# Altium PCB diplom.PcbDoc (part 2 of 2)
Units mm, origin at the board's own origin, x right, y up, seen from the top; angles counter-clockwise.
Board outline 160 x 160 mm, 2 copper layers (Top Layer, Bottom Layer), stack 1.099 mm thick; 231 components, 171 nets, 635 pads, 180 vias.
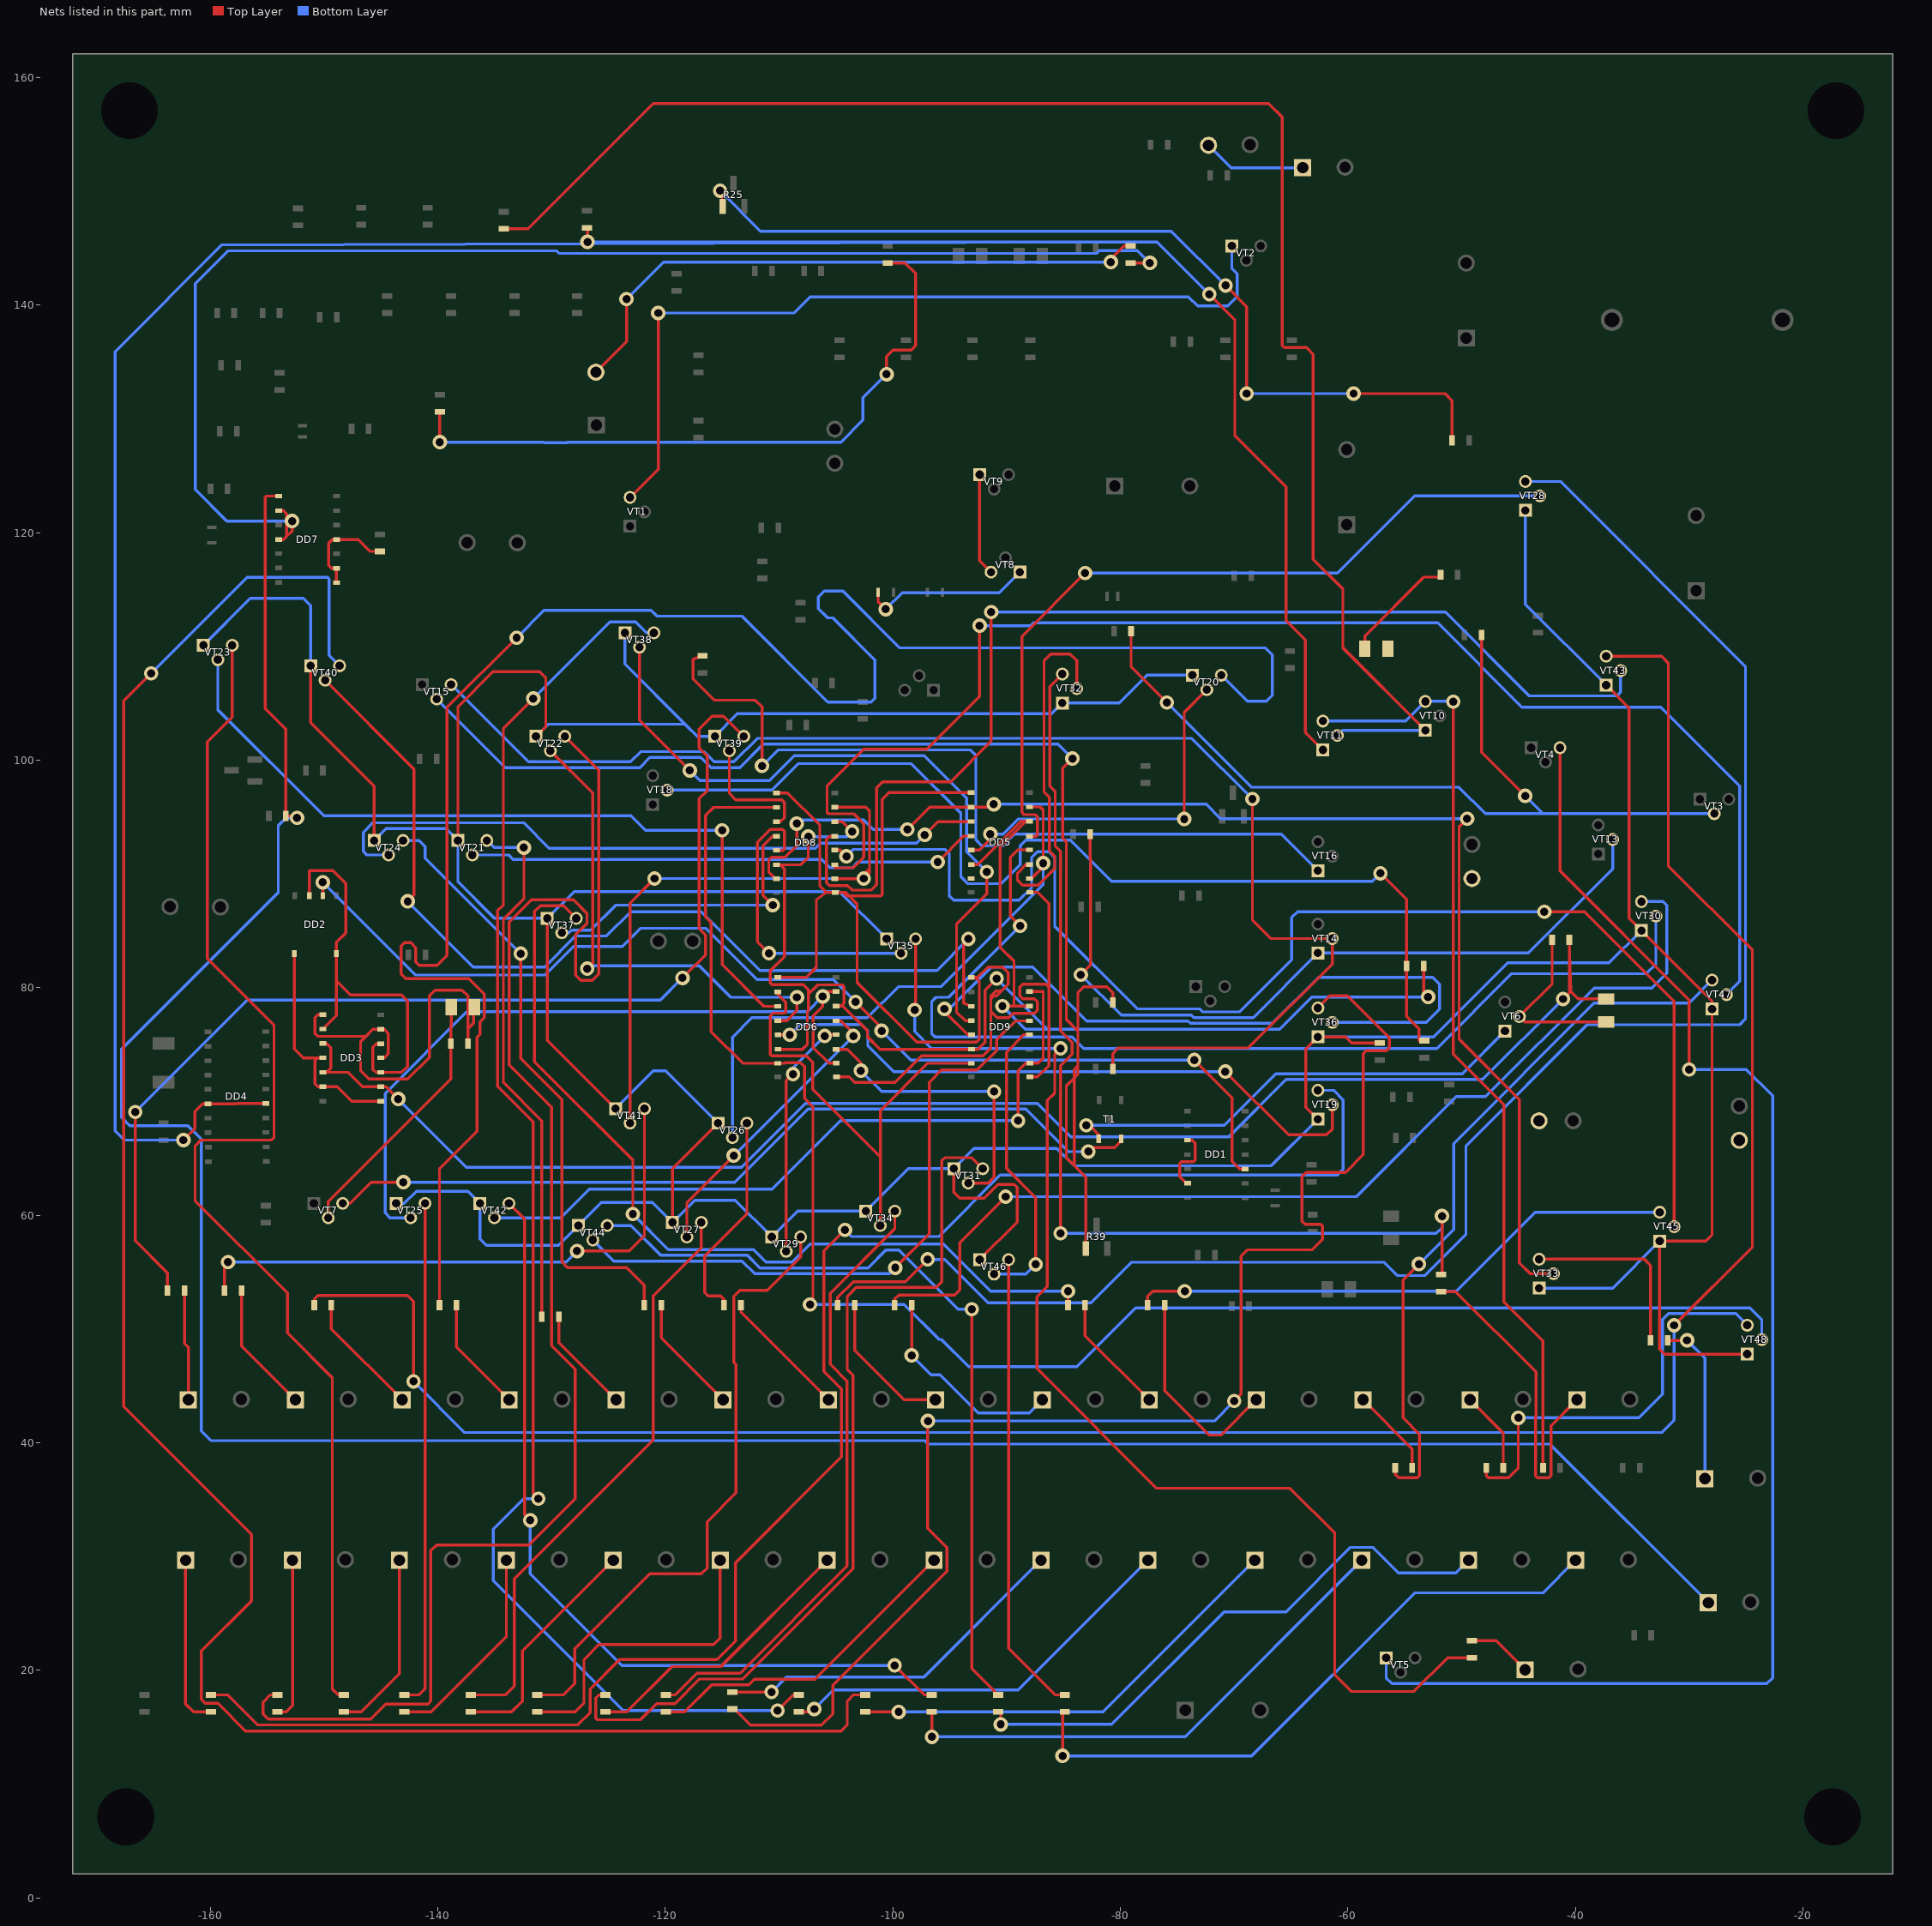
[diagram p2: the nets of this part, all layers, seen from the top]

## Via types
v1: diameter 1.27, hole 0.711, Top Layer to Bottom Layer, 180 vias

## Nets (pads, with @x,y where several pads share a name; then routed paths per layer and width w, separated by ;. In a path a pad name is that pad's centre, name@x,y a point inside that pad or via, vN(x,y) a via of type N, cw(c..) or ccw(c..) an arc to the next point about the centre after c; other vN are vias at no path point) (continued)
NetC39_1: C39.1 VT19.1 VT20.1 VT21.1 VT22.1 VT23.1 VT24.1 VT25.1 VT26.1 VT27.1 VT28.1 VT29.1 VT30.1 VT31.1 VT32.1 VT33.1 VT34.1 VT35.1 VT36.1 VT37.1 VT38.1 VT39.1 VT40.1 VT41.1 VT42.1 VT43.1 VT44.1 VT45.1 VT46.1 VT47.1 VT48.1 | length 489.8
  Top Layer w0.254: VT40.1@-151.17,108.3 -151.17,103.313 -145.589,97.732 VT24.1@-145.589,92.942 ; VT21.1@-138.223,92.942 -138.223,104.709 -135.146,107.787 -131.056,107.787 -130.497,107.228 -130.497,102.973 VT22.1@-131.37,102.1 ; VT37.1@-130.37,86.1 -130.37,75.37 VT41.1@-124.37,69.37 ; VT27.1@-119.37,59.37 -119.37,64.1 VT26.1@-115.37,68.1 ; VT31.1@-94.64,64.1 -94.64,62.016 -94.132,61.508 -91.966,61.508 -90.772,62.702 -89.324,62.702 -89.07,62.448 -89.07,59.4 VT46.1@-92.37,56.1 ; VT19.1@-62.643,68.446 -63.695,69.498 -63.695,74.633 VT36.1@-62.643,75.685 -60.19,75.685 -59.655,75.15 C39.1@-57.2,75.15 ; VT43.1@-37.3,106.6 -35.276,104.576 -35.276,86.106 VT30.1@-34.2,85.03 -28,78.83 VT47.1@-28,78.13 -28,58.272 -28.542,57.73 VT45.1@-32.6,57.73 -32.6,48.226 -32.174,47.8 VT48.1@-24.9,47.8
  Bottom Layer w0.254: VT23.1@-160.6,110.1 -156.47,114.23 -151.808,114.23 -151.17,113.592 VT40.1@-151.17,108.3 ; VT24.1@-145.589,92.942 -144.537,93.995 -139.275,93.995 VT21.1@-138.223,92.942 -138.223,89.3 -135.023,86.1 VT37.1@-130.37,86.1 -128.01,88.46 -104.7,88.46 VT35.1@-100.54,84.3 ; VT25.1@-143.655,61.049 -142.943,61.049 -141.875,62.118 -137.358,62.118 VT42.1@-136.289,61.049 -136.289,57.927 -135.73,57.368 -129.372,57.368 VT44.1@-127.64,59.1 -125.613,61.127 -121.127,61.127 VT27.1@-119.37,59.37 -117.423,61.317 -113.857,61.317 VT29.1@-110.64,58.1 -108.37,60.37 VT34.1@-102.37,60.37 -98.64,64.1 VT31.1@-94.64,64.1 -92.863,65.877 -85.59,65.877 -84.066,64.353 -66.737,64.353 VT19.1@-62.643,68.446 ; VT22.1@-131.37,102.1 -130.306,103.164 -118.255,103.164 ; VT41.1@-124.37,69.37 -121.056,72.684 -119.954,72.684 VT26.1@-115.37,68.1 ; VT38.1@-123.54,111.2 -123.54,108.449 -118.255,103.164 ; VT20.1@-73.67,107.47 -77.64,107.47 -80.08,105.03 VT32.1@-85.1,105.03 -86.052,104.078 -113.662,104.078 VT39.1@-115.64,102.1 -117.191,102.1 -118.255,103.164 ; VT36.1@-62.643,75.685 -52.465,75.685 -45.966,82.184 -37.046,82.184 VT30.1@-34.2,85.03 ; VT28.1@-44.4,121.96 -44.4,113.7 VT43.1@-37.3,106.6 ; VT33.1@-43.2,53.6 -36.73,53.6 VT45.1@-32.6,57.73
NetDD1_3: DD1.3 DD1.6 | length 5.8
  Top Layer w0.254: DD1.3@-74.105,66.605 -73.695,66.605 -73.424,66.334 -73.424,64.861 -73.576,64.708 -74.629,64.708 -74.781,64.556 -74.781,63.4 -74.211,62.83 DD1.6@-74.1,62.83
NetDD1_10: DD1.10 DD2.3 | length 99.5
  Top Layer w0.254: v1(-150.106,89.27) -150.1,89.264 DD2.3@-150.1,88.1 ; v1(-103.269,78.755) -100.983,76.469 v1(-100.983,76.215) ; v1(-73.5,73.649) -70.172,70.322 -70.172,64.735 -69.512,64.075 DD1.10@-69.025,64.075
  Bottom Layer w0.254: v1(-150.106,89.27) -141.953,81.117 -130.583,81.117 -128.069,83.631 -123.766,83.631 -122.166,85.232 -116.451,85.232 -111.955,80.736 -105.25,80.736 v1(-103.269,78.755) ; v1(-100.983,76.215) -98.417,73.649 v1(-73.5,73.649)
NetDD2_1: DD2.1 DD3.1 DD3.11 DD3.13 | length 20
  Top Layer w0.254: DD2.1@-152.6,83 -152.6,74.632 -151.808,73.84 -150.538,73.84 ; DD3.11@-150.1,73.84 -150.538,73.84 ; DD3.1@-145.02,70.03 -147.566,70.03 -148.836,71.3 DD3.13@-150.1,71.3 -150.538,71.3 -150.792,71.554 -150.792,73.586 -150.538,73.84
NetDD2_2: DD2.2 DD2.5 DD3.3 DD3.5 DD3.9 | length 38.4
  Top Layer w0.254: DD2.5@-151.29,88.08 -151.29,90.245 -151.23,90.305 -149.198,90.305 -148.074,89.181 -148.074,84.813 -148.9,83.987 DD2.2@-148.9,83 -148.9,81.815 -148.9,80.596 ; DD3.9@-150.1,76.37 -148.9,77.57 -148.9,80.596 ; DD3.5@-145.025,75.075 -145.407,75.075 -145.712,74.77 -145.712,72.824 -145.458,72.57 DD3.3@-145.02,72.57 -143.172,72.57 -142.664,73.078 -142.664,78.856 -143.172,79.364 -147.668,79.364 -148.9,80.596
NetDD3_2: DD3.2 DD3.10 DD3.12 R17.1 VD6.2 | length 137.6
  Top Layer w0.254: DD3.12@-150.1,72.57 -149.763,72.57 ; DD3.10@-150.1,75.1 -149.776,75.1 -149.395,74.719 -149.395,72.938 -149.763,72.57 ; v1(-143.477,70.22) -144.557,71.3 DD3.2@-145.02,71.3 -146.626,71.3 -147.896,72.57 -149.763,72.57 ; v1(-41.089,79.009) -40.426,79.672 ; VD6.2@-37.3,79.016 -39.77,79.016 -40.426,79.672 ; -40.426,79.672 -40.55,79.796 R17.1@-40.55,84.2 -40.426,79.672
  Bottom Layer w0.254: v1(-143.477,70.22) -137.482,64.226 -113.302,64.226 -107.688,69.839 -87.292,69.839 -84.346,66.893 -70.468,66.893 -65.429,71.932 -48.166,71.932 v1(-41.089,79.009)
NetDD3_4: DD3.4 DD3.6 DD3.8 R16.1 VD7.2 | length 37.7
  Top Layer w0.254: DD3.8@-150.1,77.64 -150.538,77.64 -150.792,77.386 -150.792,75.986 -150.538,75.732 -146.325,75.732 ; DD3.4@-145.02,73.84 -144.696,73.84 -144.34,74.196 -144.34,75.989 -144.696,76.345 DD3.6@-145.025,76.345 -145.712,76.345 -146.325,75.732 ; R16.1@-137.35,75.1 -137.35,76.392 ; VD7.2@-136.786,78.295 -136.786,78.122 -136.842,78.122 -136.842,76.9 -137.35,76.392 ; -146.325,75.732 -146.779,75.278 -146.779,72.709 -146.042,71.973 -142.639,71.973 -140.734,73.878 -140.734,79.288 -140.226,79.796 -137.858,79.796 -137.35,79.288 -137.35,76.392
NetDD4_6: DD4.6 R31.1 VT11.1 | length 276.2
  Top Layer w0.254: v1(-162.349,66.613) -161.358,67.604 -161.358,69.128 -160.681,69.805 DD4.6@-160.2,69.805 -157.675,69.805 -157.65,69.83 DD4.6@-155.1,69.83 ; R31.1@-126.9,146.8 -126.84,146.8 v1(-126.84,145.557) ; v1(-72.179,140.959) -69.944,138.724 -69.944,128.535 -65.448,124.039 -65.448,112.274 -63.746,110.572 -63.746,102.446 VT11.1@-62.2,100.9
  Bottom Layer w0.254: v1(-162.349,66.613) -167.556,66.613 -168.369,67.426 -168.369,135.905 -158.996,145.277 -126.839,145.395 -82.415,145.557 ; v1(-126.84,145.557) -82.415,145.557 ; v1(-72.179,140.959) -76.776,145.557 -82.415,145.557
NetDD4_13: VD2.2
NetDD4_14: DD5.6 DD5.14 DD6.6 DD6.14 DD8.6 DD8.14 DD9.6 DD9.14 R44.1 | length 135.4
  Top Layer w0.254: DD8.6@-110.22,90.81 -109.888,90.81 ; DD6.6@-110.095,74.595 -107.967,74.595 -107.51,75.051 -107.51,77.922 -107.409,78.024 -107.409,79.44 ; v1(-107.434,93.283) -107.434,91.48 -108.104,90.81 -109.888,90.81 ; DD8.14@-105.1,94.6 -104.433,94.6 v1(-103.573,93.741) ; DD5.6@-93.1,90.83 -92.53,90.83 -88.74,94.62 -88.318,94.62 ; v1(-90.873,80.812) -91.889,79.796 -91.889,75.224 -92.518,74.595 DD9.6@-93.095,74.595 -101.137,74.595 -102.236,75.694 -102.236,76.224 -104.481,78.468 ; v1(-90.365,78.385) -89.316,78.385 ; DD5.14@-87.98,94.62 -88.318,94.62 ; DD9.14@-87.975,78.385 -89.316,78.385 ; R44.1@-53.35,81.9 -53.35,79.585 v1(-52.951,79.186) ; -109.888,90.81 -109.542,90.464 -109.542,82.736 -110.781,81.498 -110.781,80.431 -110.629,80.279 -107.866,80.279 -107.409,79.821 -107.409,79.44 ; -107.409,79.44 -106.596,80.253 -104.437,80.253 -104.285,80.101 -104.285,78.664 -104.481,78.468 ; -104.481,78.468 -104.564,78.385 DD6.14@-104.975,78.385 -104.481,78.468 ; -89.316,78.385 -89.349,78.418 -89.349,82.336 -90.561,83.548 -90.561,92.377 -88.318,94.62
  Bottom Layer w0.254: v1(-107.434,93.283) -104.031,93.283 v1(-103.573,93.741) ; v1(-90.873,80.812) -86.421,76.36 ; v1(-90.365,78.385) -88.34,76.36 -86.421,76.36 ; v1(-52.951,79.186) -63.187,79.186 -66.014,76.36 -86.421,76.36
NetDD4_15: SB4.1
NetDD4_16: SB3.1
NetDD4_17: SB2.1
NetDD4_18: DD5.1 DD5.9 DD6.1 DD6.9 DD8.1 DD8.9 DD9.1 DD9.9 | length 127.2
  Top Layer w0.254: DD8.1@-110.225,97.125 -109.25,97.125 -106.418,94.293 -106.418,88.94 -105.853,88.375 ; DD6.1@-110.1,80.91 -107.612,80.91 -106.723,81.799 -106.723,87.74 -105.853,88.375 ; DD6.9@-104.95,72.16 -103.84,72.16 -103.354,71.675 -99.817,71.675 -97.487,74.005 -92.093,74.005 -91.381,74.716 -91.381,77.891 ; DD5.1@-93.105,97.145 -100.347,97.145 -100.932,96.56 -100.932,88.178 -101.033,88.076 -103.853,88.076 ; DD9.1@-93.1,80.91 -92.749,80.91 ; DD5.9@-87.955,88.395 -87.292,88.395 -86.278,87.381 -86.278,80.05 ; DD9.9@-87.95,72.16 -87.285,72.16 -86.278,73.167 -86.278,80.05 ; -105.853,88.375 DD8.9@-105.075,88.375 -104.38,88.375 ; -104.38,88.375 -104.151,88.375 -103.853,88.076 ; -104.38,88.375 -104.081,88.076 -103.853,88.076 ; -103.853,88.076 -103.142,87.365 -103.142,80.456 -97.897,75.211 -92.664,75.211 -92.397,75.478 -92.397,80.558 -92.749,80.91 ; -92.749,80.91 -92.553,80.91 -91.635,81.828 -90.365,81.828 -89.857,81.32 -89.857,80.304 -90.46,79.702 ; -91.381,77.891 -91.381,79.034 ; -91.381,77.891 -90.848,77.358 -89.832,77.358 -89.451,77.739 -87.573,77.739 -87.294,78.018 -87.294,78.78 -87.548,79.034 -88.587,79.034 -88.841,79.288 -88.841,80.05 -88.587,80.304 -86.532,80.304 -86.278,80.05 ; -91.381,79.034 -91.381,79.288 -90.968,79.702 -90.46,79.702 ; -91.381,79.034 -91.127,79.288 -90.873,79.288 -90.46,79.702
NetDD4_19: DD5.7
NetDD5_2: DD5.2 DD8.7 VT33.2 | length 112.7
  Top Layer w0.254: DD8.7@-110.225,89.575 -110.33,89.575 -110.901,90.146 -110.901,91.226 -110.672,91.455 -109.492,91.455 -108.45,92.496 v1(-108.45,94.426) ; v1(-98.722,93.918) -96.765,95.875 DD5.2@-93.105,95.875 -91.382,95.875 v1(-91.129,96.128) ; v1(-49.522,94.858) -50.231,94.149 -50.231,75.476 -44.925,70.169 -44.925,55.818 -43.976,54.87 VT33.2@-41.93,54.87
  Bottom Layer w0.254: v1(-108.45,94.426) -108.12,94.757 -102.557,94.757 -101.719,93.918 v1(-98.722,93.918) ; v1(-91.129,96.128) -72.458,96.128 -71.188,94.858 v1(-49.522,94.858)
NetDD5_3: DD5.3 VT24.2 | length 59.7
  Top Layer w0.254: v1(-97.198,93.436) -96.029,94.605 DD5.3@-93.105,94.605
  Bottom Layer w0.254: VT24.2@-144.319,91.672 -146.235,91.672 -146.55,91.988 -146.55,93.664 -145.712,94.503 -132.45,94.503 -130.209,92.261 -106.825,92.261 -106.37,92.716 -97.918,92.716 v1(-97.198,93.436)
NetDD5_4: DD5.4 VT21.2 | length 45.5
  Top Layer w0.254: v1(-96.055,91.049) -93.769,93.335 DD5.4@-93.105,93.335
  Bottom Layer w0.254: VT21.2@-136.953,91.672 -133.766,91.672 -133.382,91.288 -106.241,91.288 -105.493,90.54 -103.581,90.54 -103.072,91.049 v1(-96.055,91.049)
NetDD5_5: DD5.5 VT20.2 | length 32.3
  Top Layer w0.254: DD5.5@-93.1,92.1 -92.372,92.1 -91.432,93.04 v1(-91.432,93.512) ; v1(-74.389,94.833) -74.389,104.211 VT20.2@-72.4,106.2
  Bottom Layer w0.254: v1(-91.432,93.512) -90.315,93.512 -88.994,94.833 v1(-74.389,94.833)
NetDD5_10: DD5.10 DD5.15 VT26.2 | length 51.9
  Top Layer w0.254: DD5.15@-87.98,95.895 -87.104,95.895 ; DD5.10@-87.975,89.6 -87.825,89.6 -86.784,90.641 v1(-86.784,90.947) -86.784,95.575 ; -87.104,95.895 -87.038,95.895 -86.784,95.641 -86.784,95.575 ; -87.104,95.895 -86.784,95.575
  Bottom Layer w0.254: VT26.2@-114.1,66.83 -114.1,75.645 -112.387,77.358 -102.253,77.358 -99.509,80.101 -95.776,80.101 -86.784,89.092 v1(-86.784,90.947)
NetDD5_11: DD5.11 VT32.2 | length 30.5
  Top Layer w0.254: DD5.11@-87.98,90.82 -88.308,90.82 -89.045,90.083 -89.045,89.448 -88.613,89.016 -87.223,89.016 -85.768,90.471 -85.768,91.556 -86.236,92.024 -86.236,96.723 -86.708,97.195 -86.708,108.752 -86.124,109.336 -84.414,109.336 -83.83,108.752 VT32.2@-83.83,106.3
NetDD5_12: DD5.12 VT30.2 | length 93.2
  Top Layer w0.254: v1(-88.816,85.435) -89.68,86.298 -89.68,91.48 -89.04,92.12 DD5.12@-87.98,92.12
  Bottom Layer w0.254: v1(-88.816,85.435) -95.09,79.161 -96.207,79.161 -96.588,78.78 -96.588,75.986 -96.284,75.681 -84.244,75.681 -83.228,74.665 -52.189,74.665 -45.618,81.237 -33.791,81.237 -32.93,82.098 VT30.2@-32.93,86.3
NetDD5_13: DD5.13 VT28.2 | length 70
  Top Layer w0.254: DD5.13@-87.98,93.32 -87.394,93.32 -87.299,93.415 -87.299,95.036 -87.477,95.214 -88.46,95.214 -88.664,95.417 -88.664,110.886 v1(-83.102,116.447)
  Bottom Layer w0.254: v1(-83.102,116.447) -60.928,116.447 -54.145,123.23 VT28.2@-43.13,123.23
NetDD6_2: DD6.2 DD9.7 VT34.2 | length 41.6
  Top Layer w0.254: DD6.2@-110.1,79.64 -110.1,79.415 -109.419,78.734 -109.419,77.891 -109.546,77.764 -110.533,77.764 -110.787,77.51 -110.787,74.132 -110.66,74.005 -107.612,74.005 -107.053,73.446 -107.053,71.068 -101.1,65.115 ; VT34.2@-101.1,59.1 -101.1,65.115 ; DD9.7@-93.1,73.36 -96.944,73.36 -101.1,69.204 -101.1,65.115
NetDD6_3: DD6.3 VT23.2 | length 71.3
  Top Layer w0.254: v1(-115.003,93.842) -115.003,82.031 -111.342,78.37 DD6.3@-110.1,78.37
  Bottom Layer w0.254: VT23.2@-159.33,108.83 -159.33,104.438 -150.005,95.112 -123.02,95.112 -121.75,93.842 v1(-115.003,93.842)
NetDD6_4: DD6.4 VT22.2 | length 43.8
  Top Layer w0.254: VT22.2@-130.1,100.83 -126.376,97.106 -126.376,82.165 v1(-126.865,81.676) ; DD6.4@-110.1,77.1 -109.321,77.1 -108.425,77.996 v1(-108.425,79.161)
  Bottom Layer w0.254: v1(-126.865,81.676) -126.611,81.93 -117.01,81.93 -114.241,79.161 v1(-108.425,79.161)
NetDD6_5: DD6.5 VT19.2 | length 56.2
  Top Layer w0.254: DD6.5@-110.095,75.865 -109.066,75.865 v1(-109.06,75.859) ; v1(-70.782,72.633) -65.219,67.071 -61.892,67.071 -61.373,67.589 VT19.2@-61.373,69.716
  Bottom Layer w0.254: v1(-109.06,75.859) -108.145,76.773 -102.735,76.773 -102.202,76.24 -102.202,74.919 -99.916,72.633 v1(-70.782,72.633)
NetDD6_7: DD6.7 DD8.2 VT48.2 | length 146.8
  Top Layer w0.254: DD8.2@-110.225,95.855 -115.74,95.855 -116.451,95.144 -116.451,86.229 -115.961,85.739 -115.961,76.121 -113.2,73.36 DD6.7@-110.1,73.36 -109.517,73.36 -109.456,73.421 -108.12,73.421 -107.764,73.065 -107.764,70.271 -107.028,69.534 -107.028,52.415 v1(-107.282,52.161)
  Bottom Layer w0.254: v1(-107.282,52.161) -99.001,52.161 -95.928,49.087 -95.721,49.087 -93.334,46.7 -83.812,46.7 -78.649,51.863 -24.653,51.863 -23.63,50.84 VT48.2@-23.63,49.07
NetDD6_10: DD6.10 DD6.15 VT25.2 | length 64.4
  Top Layer w0.254: v1(-106.164,79.237) -105.741,79.66 -105.58,79.66 ; DD6.15@-104.975,79.66 -105.58,79.66 ; DD6.10@-104.97,73.365 -105.626,73.365 -107.002,74.741 -107.002,77.516 -106.164,78.354 -106.164,79.076 -105.58,79.66
  Bottom Layer w0.254: VT25.2@-142.385,59.779 -144.188,59.779 -144.62,60.211 -144.62,70.71 -137.439,77.891 -107.51,77.891 v1(-106.164,79.237)
NetDD6_11: DD6.11 VT31.2 | length 25.8
  Top Layer w0.254: DD6.11@-104.975,74.585 -103.98,74.585 -102.811,73.417 v1(-102.811,72.709) ; VT31.2@-93.37,62.83 -91.61,62.83 -91.102,63.338 v1(-91.102,70.881)
  Bottom Layer w0.254: v1(-102.811,72.709) -100.983,70.881 v1(-91.102,70.881)
NetDD6_12: DD6.12 VT29.2 | length 21.4
  Top Layer w0.254: VT29.2@-109.37,56.83 -109.37,71.815 v1(-108.78,72.405) ; v1(-105.986,75.757) -105.859,75.885 DD6.12@-104.975,75.885
  Bottom Layer w0.254: v1(-108.78,72.405) -108.78,72.963 v1(-105.986,75.757)
NetDD6_13: DD6.13 VT27.2 | length 25.9
  Top Layer w0.254: VT27.2@-118.1,58.1 -118.1,61.129 v1(-113.987,65.242) ; DD6.13@-104.975,77.085 -104.545,77.085 -103.472,76.011 v1(-103.472,75.757)
  Bottom Layer w0.254: v1(-113.987,65.242) v1(-103.472,75.757)
NetDD7_1: DD7.1 R45.1 SA2.1 | length 236.5
  Top Layer w0.254: DD7.1@-153.98,123.21 -155.079,123.21 -155.169,123.12 -155.169,104.544 -153.35,102.725 R45.1@-153.35,95.1 -152.532,95.1 v1(-152.367,94.934)
  Bottom Layer w0.254: v1(-152.367,94.934) -153.332,94.934 -154.018,94.249 -154.018,88.381 -167.81,74.589 -167.81,68.62 -167.073,67.883 -161.968,67.883 -160.774,66.69 -160.774,41.036 -159.936,40.197 -97.209,40.197 -96.905,39.893 -42.268,39.893 SA2.1@-28.325,25.95
NetDD7_2: DD7.2 DD7.4 R55.1 | length 120.3
  Top Layer w0.254: DD7.4@-153.98,119.4 -153.555,119.4 -153.281,119.674 ; DD7.2@-153.98,121.94 -153.586,121.94 -153.281,121.635 -153.281,119.674 ; v1(-152.799,121.02) -152.799,120.157 -153.281,119.674 ; R55.1@-79.111,143.707 v1(-77.411,143.707)
  Bottom Layer w0.254: v1(-152.799,121.02) -158.539,121.02 -161.308,123.789 -161.308,141.899 -158.437,144.769 -129.532,144.769 -129.304,144.541 -82.11,144.541 -81.856,144.795 -78.499,144.795 v1(-77.411,143.707)
NetDD7_8: DD7.8 DD7.9 DD7.11 R57.2 | length 9.1
  Top Layer w0.254: DD7.8@-148.9,115.6 DD7.9@-148.9,116.87 -149.334,116.87 -149.598,117.134 -149.598,119.07 -149.268,119.4 DD7.11@-148.9,119.4 -146.973,119.4 -145.923,118.35 R57.2@-145.1,118.35
NetDD8_3: DD8.3 VT39.2 | length 11.1
  Top Layer w0.254: VT39.2@-114.37,100.83 -114.37,97.068 -113.811,96.509 -109.746,96.509 -109.542,96.306 -109.542,94.941 -109.898,94.585 DD8.3@-110.225,94.585
NetDD8_4: DD8.4 VT37.2 | length 26.7
  Top Layer w0.254: v1(-110.558,87.264) -111.409,88.114 -111.409,92.496 -110.59,93.315 DD8.4@-110.225,93.315
  Bottom Layer w0.254: VT37.2@-129.1,84.83 -128.474,84.83 -128.242,85.061 -126.547,85.061 -124.345,87.264 v1(-110.558,87.264)
NetDD8_5: DD8.5 VT35.2 | length 27
  Top Layer w0.254: v1(-110.889,83.03) -111.917,84.058 -111.917,92.788 -110.787,93.918 -109.695,93.918 -109.542,93.766 -109.542,92.182 -109.644,92.08 DD8.5@-110.22,92.08
  Bottom Layer w0.254: v1(-110.889,83.03) VT35.2@-99.27,83.03
NetDD8_10: DD8.10 DD8.15 VT41.2 | length 53.5
  Top Layer w0.254: VT41.2@-123.1,68.1 -123.1,87.447 v1(-120.947,89.6) ; DD8.15@-105.1,95.875 -102.381,95.875 -102.049,95.544 -102.049,90.435 ; DD8.10@-105.095,89.58 -102.904,89.58 -102.049,90.435 ; v1(-102.557,89.6) -102.049,90.108 -102.049,90.435
  Bottom Layer w0.254: v1(-120.947,89.6) v1(-102.557,89.6)
NetDD8_11: DD8.11 VT47.2 | length 126.6
  Top Layer w0.254: DD8.11@-105.1,90.8 -105.097,90.8 -105.097,90.54 -103.497,90.54 -102.557,91.48 -102.557,94.416 -103.431,95.29 -105.656,95.29 -105.783,95.417 -105.783,97.728 -102.557,100.954 -97.02,100.954 -92.372,105.602 v1(-92.372,111.825)
  Bottom Layer w0.254: v1(-92.372,111.825) -87.902,111.825 -87.648,112.079 -52.113,112.079 -44.696,104.663 -32.504,104.663 -25.57,97.728 -25.57,80.56 VT47.2@-26.73,79.4
NetDD8_12: DD8.12 VT45.2 | length 119.9
  Top Layer w0.254: DD8.12@-105.1,92.1 -104.625,92.1 v1(-104.081,91.556) ; v1(-42.74,86.679) -39.21,86.679 -31.33,78.8 VT45.2@-31.33,59
  Bottom Layer w0.254: v1(-104.081,91.556) -103.472,92.166 -95.42,92.166 -95.039,91.785 -95.039,88.076 -94.658,87.695 -88.9,87.695 -87.8,88.795 -87.8,91.455 -87.292,91.963 -86.276,91.963 -85.768,91.455 -85.768,85.409 -78.504,78.145 -73.043,78.145 -72.782,77.884 -69.512,77.884 -64.94,82.456 -64.94,86.171 -64.432,86.679 v1(-42.74,86.679)
NetDD8_13: DD8.13 VT43.2 | length 101.6
  Top Layer w0.254: DD8.13@-105.1,93.3 -105.58,93.3 -105.834,93.046 -105.834,89.245 -105.58,88.991 -103.98,88.991 -103.573,88.584 -101.897,88.584 -101.44,89.042 -101.44,97.576 -100.906,98.109 -94.912,98.109 -91.356,101.665 v1(-91.356,113.019)
  Bottom Layer w0.254: v1(-91.356,113.019) -51.427,113.019 -44.061,105.653 -36.335,105.653 -36.03,105.958 VT43.2@-36.03,107.87
NetDD9_3: DD9.3 VT40.2 | length 86.4
  Top Layer w0.254: VT40.2@-149.9,107.03 -142.08,99.21 -142.08,88.153 v1(-142.639,87.594) ; v1(-93.363,84.292) -93.781,83.873 -93.781,78.653 DD9.3@-93.1,78.37
  Bottom Layer w0.254: v1(-142.639,87.594) -136.873,81.828 -130.603,81.828 -127.878,84.553 -125.166,84.553 -123.038,86.681 -116.834,86.681 -111.676,81.523 -96.131,81.523 v1(-93.363,84.292)
NetDD9_4: DD9.4 VT38.2 | length 62.1
  Top Layer w0.254: VT38.2@-122.27,109.93 -122.27,103.522 v1(-117.848,99.1) ; DD9.4@-93.1,77.1 -93.642,77.1 -94.401,77.859 -94.401,85.591 -91.737,88.254 v1(-91.737,90.185)
  Bottom Layer w0.254: v1(-117.848,99.1) -116.963,98.215 -110.861,98.215 -108.68,100.395 -97.25,100.395 -93.515,96.661 -93.515,91.963 v1(-91.737,90.185)
NetDD9_5: DD9.5 VT36.2 | length 64.6
  Top Layer w0.254: v1(-95.459,78.145) -95.459,77.918 -93.406,75.865 DD9.5@-93.095,75.865
  Bottom Layer w0.254: v1(-95.459,78.145) -95.03,78.145 -91.347,81.828 -87.698,81.828 -82.949,77.078 -74.062,77.078 -73.852,76.868 -66.631,76.868 -62.585,80.914 -52.545,80.914 -51.935,80.304 -51.935,78.12 -53.1,76.955 VT36.2@-61.373,76.955
NetDD9_10: DD9.10 DD9.15 VT42.2 | length 63.7
  Top Layer w0.254: v1(-88.994,68.315) -88.994,72.684 -88.313,73.365 DD9.10@-87.97,73.365 -87.216,73.365 -86.786,73.795 -86.786,79.66 DD9.15@-87.975,79.66
  Bottom Layer w0.254: VT42.2@-135.019,59.779 -129.204,59.779 -126.687,62.295 -110.609,62.295 -104.589,68.315 v1(-88.994,68.315)
NetDD9_12: DD9.12 VT46.2 | length 26.4
  Top Layer w0.254: DD9.12@-87.975,75.885 -88.46,75.885 -90.01,74.336 -90.01,64.124 -87.444,61.559 v1(-87.444,55.691)
  Bottom Layer w0.254: VT46.2@-91.1,54.83 -88.306,54.83 v1(-87.444,55.691)
NetDD9_13: DD9.13 VT44.2 | length 57.2
  Top Layer w0.254: v1(-99.789,55.387) -96.792,58.384 -96.792,71.693 -95.725,72.76 -92.597,72.76 -90.873,74.484 -90.873,75.434 -89.222,77.085 DD9.13@-87.975,77.085
  Bottom Layer w0.254: VT44.2@-126.37,57.83 -124.511,55.971 -113.247,55.971 -112.144,54.868 -100.307,54.868 v1(-99.789,55.387)
NetGB1_P: GB1.P SA1.1 | length 9.1
  Bottom Layer w0.254: GB1.P@-72.25,154.05 -70.275,152.075 SA1.1@-63.975,152.075
NetHL1_1: HL1.1 R46.1 | length 10.2
  Top Layer w0.254: R46.1@-138.35,52.1 -138.35,48.411 HL1.1@-133.722,43.783
NetHL2_1: HL2.1 R47.1 | length 15.1
  Top Layer w0.254: HL2.1@-162.164,29.683 -162.164,17.054 -161.46,16.35 R47.1@-159.942,16.35
NetHL3_1: HL3.1 R48.1 | length 9.4
  Top Layer w0.254: R48.1@-129.35,51.1 -129.35,48.809 HL3.1@-124.324,43.783
NetHL4_1: HL4.1 R49.1 | length 14.3
  Top Layer w0.254: R49.1@-154.1,16.35 -153.332,16.35 -152.766,16.916 HL4.1@-152.766,29.683
NetHL5_1: HL5.1 R51.1 | length 16.3
  Top Layer w0.254: R51.1@-148.258,16.35 -146.728,16.35 -143.368,19.71 HL5.1@-143.368,29.683
NetHL6_1: HL6.1 R52.1 | length 10.6
  Top Layer w0.254: R52.1@-120.35,52.1 -120.35,49.207 HL6.1@-114.926,43.783
NetHL7_1: HL7.1 R53.1 | length 18.4
  Top Layer w0.254: R53.1@-142.924,16.35 -140.578,16.35 -133.97,22.958 HL7.1@-133.97,29.683
NetHL8_1: HL8.1 R54.1 | length 11.5
  Top Layer w0.254: R54.1@-113.35,52.1 -113.35,51.478 HL8.1@-105.655,43.783
NetHL9_1: HL9.1 R56.1 | length 20.6
  Top Layer w0.254: R56.1@-137.082,16.35 -133.517,16.35 -132.555,17.312 -132.555,21.7 HL9.1@-124.572,29.683
NetHL10_1: HL10.1 R58.1 | length 12.9
  Top Layer w0.254: R58.1@-103.35,52.1 -103.35,48.122 -99.011,43.783 HL10.1@-96.257,43.783
NetHL11_1: HL11.1 R59.1 | length 27.8
  Top Layer w0.254: R59.1@-131.24,16.35 -127.932,16.35 -127.145,17.137 -127.145,20.97 -125.842,22.272 -115.74,22.272 -115.174,22.838 HL11.1@-115.174,29.683
NetHL12_1: HL12.1 R60.1 | length 18.5
  Top Layer w0.254: v1(-98.35,47.687) R60.1@-98.35,52.1
  Bottom Layer w0.254: v1(-98.35,47.687) -96.646,45.982 -95.846,45.982 -92.499,42.636 -88.006,42.636 HL12.1@-86.859,43.783
NetHL13_1: HL13.1 R61.1 | length 25
  Top Layer w0.254: R61.1@-125.271,16.35 -123.388,16.35 -119.404,20.334 -115.125,20.334 HL13.1@-105.776,29.683
NetHL14_1: HL14.1 R62.1 | length 29.5
  Top Layer w0.254: R62.1@-51.8,53.3 -50.538,53.3 -43.477,46.239 -43.477,42.356 -43.502,42.331 -43.502,37.099 -43.35,36.946 -42.334,36.946 -42.156,37.124 -42.156,41.496 HL14.1@-39.869,43.783
NetHL15_1: HL15.1 R63.1 | length 29.1
  Top Layer w0.254: R63.1@-119.937,16.35 -118.302,16.35 -115.918,18.734 -112.648,18.734 -112.169,19.213 -106.848,19.213 HL15.1@-96.378,29.683
NetHL16_1: HL16.1 R64.1 | length 14.5
  Top Layer w0.254: R64.1@-31.9,49 -30.204,49 v1(-30.193,49.011)
  Bottom Layer w0.254: v1(-30.193,49.011) -28.625,47.443 HL16.1@-28.625,36.85
NetHL17_2: HL17.2 R55.2 | length 53.9
  Top Layer w0.254: HL17.2@-126.1,134.1 -123.411,136.789 v1(-123.411,140.527) ; v1(-80.84,143.779) -80.84,144.033 -79.666,145.207 R55.2@-79.111,145.207
  Bottom Layer w0.254: v1(-123.411,140.527) -120.16,143.779 v1(-80.84,143.779)
NetHL18_1: HL18.1 R65.1 | length 5.7
  Top Layer w0.254: R65.1@-49.1,22.6 -46.975,22.6 HL18.1@-44.425,20.05
NetHL19_1: HL19.1 R66.1 | length 31.9
  Top Layer w0.254: R66.1@-114.1,18.1 v1(-110.659,18.1)
  Bottom Layer w0.254: v1(-110.659,18.1) -109.359,19.4 -97.263,19.4 HL19.1@-86.98,29.683
NetHL20_1: HL20.1 R67.1 | length 10.7
  Top Layer w0.254: R67.1@-83.1,52.1 -83.1,49.422 HL20.1@-77.461,43.783
NetHL21_1: HL21.1 R68.1 | length 36.2
  Top Layer w0.254: R68.1@-108.253,16.35 -107.155,16.35 v1(-106.901,16.604)
  Bottom Layer w0.254: v1(-106.901,16.604) -105.228,18.277 -88.988,18.277 HL21.1@-77.582,29.683
NetHL22_1: HL22.1 R69.1 | length 9.8
  Top Layer w0.254: R69.1@-162.25,53.4 -162.25,48.736 -161.916,48.402 HL22.1@-161.916,43.783
NetHL23_1: HL23.1 R70.1 | length 39.7
  Top Layer w0.254: R70.1@-102.411,16.35 v1(-99.484,16.35)
  Bottom Layer w0.254: v1(-99.484,16.35) -81.517,16.35 HL23.1@-68.184,29.683
NetHL24_1: HL24.1 R71.1 | length 11.6
  Top Layer w0.254: R71.1@-157.25,53.4 -157.25,48.515 HL24.1@-152.518,43.783
NetHL25_1: HL25.1 R72.1 | length 46.4
  Top Layer w0.254: R72.1@-96.569,16.35 -96.563,16.35 v1(-96.563,14.162)
  Bottom Layer w0.254: v1(-96.563,14.162) -74.307,14.162 HL25.1@-58.786,29.683
NetHL26_1: HL26.1 R73.1 | length 10.9
  Top Layer w0.254: R73.1@-149.35,52.1 -149.35,50.013 HL26.1@-143.12,43.783
NetHL27_1: HL27.1 R74.1 | length 50.3
  Top Layer w0.254: R74.1@-90.727,16.35 -90.518,16.35 v1(-90.518,15.255)
  Bottom Layer w0.254: v1(-90.518,15.255) -80.764,15.255 -70.884,25.135 -65.448,25.135 -59.769,30.814 -57.822,30.814 -55.572,28.564 -50.507,28.564 HL27.1@-49.388,29.683
NetHL28_1: HL28.1 R76.1 | length 56.3
  Top Layer w0.254: v1(-85.082,12.486) -85.082,16.35 R76.1@-84.885,16.35
  Bottom Layer w0.254: v1(-85.082,12.486) -68.471,12.486 -54.145,26.812 -42.861,26.812 HL28.1@-39.99,29.683
NetHL29_1: HL29.1 R75.1 | length 18.4
  Top Layer w0.254: R75.1@-76.1,52.1 -76.1,44.598 -72.182,40.68 -71.166,40.68 HL29.1@-68.063,43.783
NetHL30_1: HL30.1 R77.1 | length 7.8
  Top Layer w0.254: HL30.1@-58.665,43.783 -54.35,39.468 R77.1@-54.35,37.8
NetHL31_1: HL31.1 R78.1 | length 7.2
  Top Layer w0.254: HL31.1@-49.267,43.783 -46.35,40.866 R78.1@-46.35,37.8
NetL6_2: L6.2 VT8.1 | length 14.9
  Top Layer w0.254: L6.2@-101.297,114.744 -101.297,113.943 v1(-100.627,113.273)
  Bottom Layer w0.254: v1(-100.627,113.273) -99.179,114.721 -90.639,114.721 VT8.1@-88.83,116.53
NetR2_1: R2.1 VD2.1 | length 10.1
  Top Layer w0.254: VD2.1@-58.516,109.8 -58.516,110.911 -53.334,116.093 -51.85,116.093 R2.1@-51.85,116.3
NetR4_2: R4.2 R9.2 VT3.2 | length 77.7
  Top Layer w0.254: R9.2@-79.058,111.355 -79.058,108.214 v1(-75.913,105.069) ; R4.2@-48.25,111 -48.25,100.698 v1(-44.417,96.865)
  Bottom Layer w0.254: v1(-75.913,105.069) -68.468,97.624 -50.241,97.624 -47.917,95.3 -42.852,95.3 ; v1(-44.417,96.865) -42.852,95.3 ; VT3.2@-27.8,95.3 -42.852,95.3
NetR16_2: R16.2 VD7.1 VT7.2 | length 23
  Top Layer w0.254: VT7.2@-149.624,59.779 -149.624,61.193 -138.85,71.967 R16.2@-138.85,75.1 -138.85,76.672 -138.818,76.704 VD7.1@-138.818,78.295
NetR17_2: R17.2 VD6.1 VT6.2 | length 15.8
  Top Layer w0.254: R17.2@-42.05,84.2 -42.05,80.35 VT6.2@-44.93,77.47 -44.444,76.984 VD6.1@-37.3,76.984
NetR21_2: R21.2 R22.1 | length 59.3
  Top Layer w0.254: v1(-139.819,127.954) -139.819,130.629 R21.2@-139.805,130.629 ; v1(-100.551,133.923) -100.551,135.498 -99.992,136.057 -98.392,136.057 -98.011,136.438 -98.011,142.788 -98.93,143.707 R22.1@-100.447,143.707
  Bottom Layer w0.254: v1(-139.819,127.954) -130.678,127.954 -130.624,127.901 -128.646,127.901 -128.592,127.954 -104.564,127.954 -102.623,129.896 -102.623,131.851 v1(-100.551,133.923)
NetR24_2: R24.2 R25.1 | length 81.4
  Top Layer w0.254: v1(-115.181,150.052) -114.95,149.821 R25.1@-114.95,148.671 ; v1(-70.757,141.721) -68.902,139.867 v1(-68.902,132.222) ; v1(-59.504,132.222) -51.46,132.222 -50.85,131.612 R24.2@-50.85,128.1
  Bottom Layer w0.254: v1(-115.181,150.052) -111.625,146.496 -75.532,146.496 v1(-70.757,141.721) ; v1(-68.902,132.222) v1(-59.504,132.222)
NetR28_2: R28.2 VT10.3 VT11.3 | length 82.8
  Top Layer w0.254: v1(-50.739,105.142) -50.739,74.166 -46.296,69.724 -46.296,52.389 -42.85,48.943 R28.2@-42.85,37.8
  Bottom Layer w0.254: VT11.3@-62.2,103.44 -54.93,103.44 VT10.3@-53.2,105.17 -50.767,105.17 v1(-50.739,105.142)
NetR29_1: R29.1 VT10.1 VT11.2 | length 141.7
  Top Layer w0.254: R29.1@-134.2,146.7 -132.072,146.7 -121.049,157.723 -66.972,157.723 -65.778,156.529 -65.778,136.438 -65.6,136.26 -63.645,136.26 -63.06,135.676 -63.06,117.667 -60.444,115.051 -60.444,109.874 VT10.1@-53.2,102.63
  Bottom Layer w0.254: VT11.2@-60.93,102.17 -60.47,102.63 VT10.1@-53.2,102.63
NetR33_1: R33.1 VT13.2 VT14.1 | length 69
  Top Layer w0.254: v1(-83.482,81.142) -82.626,81.998 -82.626,91.277 -82.65,91.301 R33.1@-82.65,93.5
  Bottom Layer w0.254: v1(-83.482,81.142) -79.926,77.586 -73.764,77.586 -73.554,77.376 -68.319,77.376 VT14.1@-62.643,83.051 -44.143,83.051 -36.73,90.464 VT13.2@-36.73,93.03
NetR36_1: R36.1 VT14.2 VT15.3 | length 121.5
  Top Layer w0.254: R36.1@-80.671,72.867 -80.671,74.208 -80.163,74.716 -68.739,74.716 -61.373,82.082 VT14.2@-61.373,84.321 -66.773,84.321 -68.394,85.943 v1(-68.394,96.585)
  Bottom Layer w0.254: VT15.3@-138.824,106.643 -132.042,99.862 -123.055,99.862 -122.166,100.751 -116.591,100.751 -115.702,99.862 -113.961,99.862 -111.904,101.919 -73.728,101.919 v1(-68.394,96.585)
NetR38_1: R38.1 R39.1 VT15.2 | length 122.2
  Top Layer w0.254: v1(-84.219,100.141) -85.065,99.295 -85.065,93.145 -84.752,92.832 -84.752,77.205 -83.736,76.189 ; R39.1@-83.05,57.071 -83.05,63.337 -84.066,64.353 ; R38.1@-80.671,78.709 -80.671,79.551 -81.196,80.075 -83.228,80.075 -83.736,79.567 -83.736,76.189 ; -84.066,64.353 -84.752,65.039 -84.752,71.376 -84.066,72.062 ; -84.066,64.353 -84.066,72.062 ; -84.066,72.062 -84.066,72.811 -83.736,73.141 ; -84.066,72.062 -83.736,72.392 -83.736,73.141 ; -83.736,73.141 -83.736,76.189
  Bottom Layer w0.254: VT15.2@-140.094,105.373 -134.074,99.354 -122.242,99.354 -121.353,100.243 -116.865,100.243 -115.976,99.354 -113.453,99.354 -111.396,101.411 -85.489,101.411 v1(-84.219,100.141)
NetR40_2: R40.2 VT16.1 | length 73.9
  Top Layer w0.254: R40.2@-116.726,109.172 -117.557,108.878 -117.557,107.14 -115.689,105.272 -112.082,105.272 -111.498,104.688 v1(-111.498,99.506)
  Bottom Layer w0.254: v1(-111.498,99.506) -110.101,100.903 -93.16,100.903 -92.702,100.445 -92.702,93.004 -92.194,92.496 -90.315,92.496 -89.324,93.487 -65.84,93.487 VT16.1@-62.643,90.29
NetR42_1: R42.1 R44.2 VT18.2 | length 92.2
  Top Layer w0.254: v1(-57.142,90.058) -54.85,87.765 R44.2@-54.85,81.9 -54.85,77.486 -53.764,76.4 -53.764,75.35 R42.1@-53.3,75.35
  Bottom Layer w0.254: VT18.2@-119.83,97.37 -110.637,97.37 -108.311,99.697 -98.379,99.697 -94.023,95.341 -94.023,89.778 -93.388,89.143 -90.494,89.143 -88.816,90.821 -88.816,92.471 -88.308,92.979 -84.404,92.979 -80.769,89.344 -57.856,89.344 v1(-57.142,90.058)
NetR46_2: R46.2 VT20.3 | length 174.9
  Top Layer w0.254: R46.2@-139.85,52.1 -139.85,64.068 -136.543,67.375 -136.543,75.63 -136.289,75.884 -136.289,77.002 -135.905,77.386 -135.905,79.438 -137.279,80.812 -142.816,80.812 -143.223,81.218 -143.223,83.657 -142.918,83.962 -142.359,83.962 -141.927,83.53 -141.927,82.26 -141.648,81.98 -140.048,81.98 -139.184,82.844 -139.184,104.637 v1(-133.063,110.759)
  Bottom Layer w0.254: v1(-133.063,110.759) -130.659,113.162 -121.236,113.162 -120.738,112.664 -113.276,112.664 -105.707,105.094 -101.922,105.094 -101.567,105.45 -101.567,108.803 -105.275,112.511 -105.732,112.511 -106.545,113.324 -106.545,114.34 -106.012,114.873 -104.386,114.873 -99.382,109.87 -67.251,109.87 -66.642,109.26 -66.642,105.704 -67.175,105.171 -68.831,105.171 VT20.3@-71.13,107.47
NetR47_2: R47.2 VT19.3 | length 148
  Top Layer w0.254: R47.2@-159.942,17.85 -158.493,17.85 -155.854,15.211 -127.696,15.211 -126.611,16.296 -126.611,18.353 -124.02,20.944 -115.461,20.944 -113.835,22.57 -113.835,29.453 -104.524,38.764 -104.524,44.747 -106.066,46.289 -106.066,56.856 v1(-104.208,58.714)
  Bottom Layer w0.254: v1(-104.208,58.714) -103.624,58.13 -95.979,58.13 -90.569,63.54 -60.927,63.54 -60.419,64.048 -60.419,70.144 -61.261,70.986 VT19.3@-62.643,70.986
NetR48_2: R48.2 VT21.3 | length 46.9
  Top Layer w0.254: v1(-132.428,92.318) -132.428,87.822 -134.231,86.019 -134.231,71.672 -130.85,68.29 R48.2@-130.85,51.1
  Bottom Layer w0.254: VT21.3@-135.683,92.942 -135.059,92.318 v1(-132.428,92.318)
NetR49_2: R49.2 VT22.3 | length 137.6
  Top Layer w0.254: R49.2@-154.1,17.85 -154.699,17.85 -155.364,17.185 -155.364,16.169 -154.914,15.719 -145.89,15.719 -144.576,17.033 -140.861,17.033 -140.607,17.287 -140.607,30.52 -140.099,31.028 -131.996,31.028 -127.932,35.092 -127.932,46.471 -129.989,48.529 -129.989,69.484 -133.723,73.217 -133.723,85.765 -131.767,87.721 -128.084,87.721 -126.884,86.52 -126.884,85.67 -127.881,84.673 -127.881,81.093 -127.447,80.66 -126.408,80.66 -125.849,81.218 -125.849,99.119 VT22.3@-128.83,102.1
NetR51_2: R51.2 VT23.3 | length 107.8
  Top Layer w0.254: VT23.3@-158.06,110.1 -158.06,103.795 -160.241,101.615 -160.241,82.565 -154.399,76.723 -154.399,66.817 -154.602,66.613 -160.8,66.613 -161.333,66.08 -161.333,61.291 -153.206,53.164 -153.206,49.666 -149.268,45.729 -149.268,18.358 -148.76,17.85 R51.2@-148.258,17.85
NetR52_2: R52.2 VT24.3 | length 53.5
  Top Layer w0.254: v1(-132.707,82.996) -132.707,73.778 -129.1,70.171 -129.1,55.92 -128.592,55.412 -123.399,55.412 -121.85,53.863 R52.2@-121.85,52.1
  Bottom Layer w0.254: VT24.3@-143.049,92.942 -141.648,92.942 -141.115,92.409 -141.115,91.404 v1(-132.707,82.996)
NetR53_2: R53.2 VT25.3 | length 44.7
  Top Layer w0.254: R53.2@-142.924,17.85 -141.648,17.85 -141.115,18.383 -141.115,46.42 VT25.3@-141.115,61.049
NetR54_2: R54.2 VT26.3 | length 18.9
  Top Layer w0.254: R54.2@-114.85,52.1 -114.85,52.618 -115.155,52.923 -116.248,52.923 -116.527,53.202 -116.527,56.428 -112.83,60.125 VT26.3@-112.83,68.1
NetR56_2: R56.2 VT27.3 | length 51.7
  Top Layer w0.254: R56.2@-137.082,17.85 -134.028,17.85 -133.266,18.612 -133.266,28.031 -121.049,40.248 -121.049,52.921 -116.83,57.139 VT27.3@-116.83,59.37
NetR58_2: R58.2 VT28.3 | length 156.4
  Top Layer w0.254: R58.2@-104.85,52.1 -104.85,52.796 -103.478,54.167 -98.9,54.167 v1(-96.944,56.123)
  Bottom Layer w0.254: v1(-96.944,56.123) -95.445,56.123 -91.635,52.313 -82.593,52.313 -79.037,55.869 -56.812,55.869 -55.644,54.701 -53.256,54.701 -49.624,58.333 -49.624,66.115 -38.99,76.748 -25.57,76.748 -25.062,77.256 -25.062,108.244 -41.318,124.5 VT28.3@-44.4,124.5
NetR59_2: R59.2 VT29.3 | length 55.4
  Top Layer w0.254: R59.2@-131.24,17.85 -128.943,17.85 -127.957,18.836 -127.957,21.884 -121.353,28.488 -116.832,28.488 -116.324,28.996 -116.324,33.06 -113.784,35.6 -113.784,46.878 -113.987,47.081 -113.987,52.872 -113.444,53.416 -111.031,53.416 -108.1,56.346 VT29.3@-108.1,58.1
NetR60_2: R60.2 VT30.3 | length 91
  Top Layer w0.254: R60.2@-99.85,52.1 -99.85,52.633 -99.484,52.999 -94.556,52.999 -94.125,53.431 -94.125,57.596 v1(-90.086,61.635)
  Bottom Layer w0.254: v1(-90.086,61.635) -59.276,61.635 -50.487,70.423 -47.897,70.423 -38.346,79.974 -33.292,79.974 -31.971,81.295 -31.971,87.241 -32.299,87.57 VT30.3@-34.2,87.57
NetR61_2: R61.2 VT31.3 | length 78.6
  Top Layer w0.254: R61.2@-125.271,17.85 -125.819,17.85 -126.103,17.566 -126.103,15.788 -125.976,15.661 -122.192,15.661 -120.769,17.083 -119.144,17.083 -116.985,19.242 -113.2,19.242 -103.508,28.934 -103.508,45.93 -104.005,46.427 -104.005,52.872 -103.218,53.659 -96.182,53.659 -95.699,54.142 -95.699,64.81 -95.445,65.064 -93.064,65.064 VT31.3@-92.1,64.1
NetR62_2: R62.2 VT32.3 | length 90.8
  Top Layer w0.254: v1(-85.26,58.409) -85.26,73.141 -84.244,74.157 -84.244,75.173 -85.26,76.189 -85.26,91.975 -85.728,92.443 -85.728,97.242 -86.2,97.714 -86.2,106.47 VT32.3@-85.1,107.57 ; R62.2@-51.8,54.8 -51.732,54.8 v1(-51.732,59.933)
  Bottom Layer w0.254: v1(-85.26,58.409) -52.24,58.409 -51.732,58.917 v1(-51.732,59.933)
NetR63_2: R63.2 VT34.3 | length 54.8
  Top Layer w0.254: R63.2@-119.937,17.85 -119.118,17.85 -117.218,19.75 -113.429,19.75 -104.016,29.163 -104.016,45.422 -105.504,46.91 -105.504,53.136 -99.83,58.809 VT34.3@-99.83,60.37
NetR64_2: R64.2 VT33.3 | length 16.6
  Top Layer w0.254: VT33.3@-43.2,56.14 -33.952,56.14 -33.4,55.588 R64.2@-33.4,49
NetR65_2: R65.2 VT35.3 | length 109.1
  Top Layer w0.254: v1(-98.087,78.043) -98,78.13 VT35.3@-98,84.3 ; v1(-85.26,74.665) -85.768,74.157 -85.768,70.754 -86.428,70.093 -86.428,53.736 -87.343,52.821 -87.343,46.547 -76.802,36.006 -65.092,36.006 -61.155,32.069 -61.155,19.598 -59.708,18.15 -54.196,18.15 -51.246,21.1 R65.2@-49.1,21.1
  Bottom Layer w0.254: v1(-98.087,78.043) -98.087,76.164 -96.588,74.665 v1(-85.26,74.665)
NetR66_2: R66.2 VT36.3 | length 122.5
  Top Layer w0.254: R66.2@-114.1,16.6 -113.911,16.6 -112.49,15.178 -106.274,15.178 -105.275,16.177 -105.275,18.684 -95.247,28.712 -95.247,30.779 -96.944,32.476 -96.944,41.899 v1(-96.919,41.925) ; v1(-69.995,43.677) -69.385,44.287 -69.385,56.428 -68.852,56.961 -63.187,56.961 -62.248,57.901 -62.248,59.044 -62.4,59.197 -63.752,59.197 -64.031,59.476 -64.031,63.408 -63.67,63.769 -60.216,63.769 -58.641,65.343 -58.641,74.208 -58.387,74.462 -56.623,74.462 -56.369,74.716 -56.369,75.605 -60.052,79.288 -61.58,79.288 VT36.3@-62.643,78.225
  Bottom Layer w0.254: v1(-96.919,41.925) -71.747,41.925 v1(-69.995,43.677)
NetR67_2: R67.2 VT37.3 | length 78.1
  Top Layer w0.254: VT37.3@-127.83,86.1 -128.943,87.213 -130.98,87.213 -131.488,86.705 -131.488,73.497 -122.852,64.861 v1(-122.852,60.111) ; R67.2@-84.6,52.1 v1(-84.6,53.329)
  Bottom Layer w0.254: v1(-122.852,60.111) -119.728,56.987 -112.246,56.987 -111.143,55.884 -108.867,55.884 -107.282,57.469 -95.547,57.469 -91.407,53.329 v1(-84.6,53.329)
NetR68_2: R68.2 VT38.3 | length 128.7
  Top Layer w0.254: v1(-131.605,105.425) -134.231,102.799 -134.231,87.289 -134.739,86.781 -134.739,71.329 -131.615,68.204 -131.615,35.549 v1(-131.158,35.092) ; v1(-110.131,16.474) -108.755,17.85 R68.2@-108.253,17.85
  Bottom Layer w0.254: v1(-131.605,105.425) -124.884,112.146 -122.598,112.146 -121.652,111.2 VT38.3@-121,111.2 ; v1(-131.158,35.092) -132.428,35.092 -135.12,32.4 -135.12,27.878 -123.716,16.474 v1(-110.131,16.474)
NetR69_2: R69.2 VT39.3 | length 98.5
  Top Layer w0.254: v1(-166.591,69.077) -166.591,57.77 -163.75,54.929 R69.2@-163.75,53.4 ; v1(-118.483,80.863) -116.469,82.877 -116.469,84.64 -117.035,85.206 -117.035,96.611 -116.324,97.322 -116.324,100.37 -117.035,101.081 -117.035,102.732 -115.892,103.875 -114.875,103.875 VT39.3@-113.1,102.1
  Bottom Layer w0.254: v1(-166.591,69.077) -156.761,78.907 -120.439,78.907 v1(-118.483,80.863)
NetR70_2: R70.2 VT40.3 | length 186.9
  Top Layer w0.254: v1(-165.194,107.634) -167.607,105.221 -167.607,43.195 -156.38,31.968 -156.38,26.1 -160.774,21.706 -160.774,17.439 -160.444,17.109 -159.326,17.109 -156.888,14.67 -104.564,14.67 -104.005,15.229 -104.005,17.312 -103.467,17.85 R70.2@-102.411,17.85
  Bottom Layer w0.254: v1(-165.194,107.634) -156.761,116.067 -149.674,116.067 -149.547,115.94 -149.547,109.217 VT40.3@-148.63,108.3
NetR71_2: R71.2 VT41.3 | length 51.3
  Top Layer w0.254: R71.2@-158.75,53.4 -158.75,55.582 v1(-158.437,55.895) ; v1(-127.754,56.86) -123.185,56.86 -121.83,58.215 VT41.3@-121.83,69.37
  Bottom Layer w0.254: v1(-158.437,55.895) -128.719,55.895 v1(-127.754,56.86)
NetR72_2: R72.2 VT42.3 | length 73
  Top Layer w0.254: VT42.3@-133.749,61.049 -132.377,59.677 -132.377,33.702 v1(-131.869,33.194) ; v1(-99.84,20.436) -97.253,17.85 R72.2@-96.569,17.85
  Bottom Layer w0.254: v1(-131.869,33.194) -131.869,28.488 -123.817,20.436 v1(-99.84,20.436)
NetR73_2: R73.2 VT43.3 | length 207.9
  Top Layer w0.254: R73.2@-150.85,52.1 -150.85,52.636 -150.538,52.948 -142.664,52.948 -142.131,52.415 v1(-142.131,45.404) ; VT43.3@-37.3,109.14 -32.428,109.14 -31.844,108.556 -31.844,90.718 -24.452,83.327 -24.452,57.215 v1(-31.336,50.332)
  Bottom Layer w0.254: v1(-142.131,45.404) -137.635,40.909 -32.428,40.909 -31.336,42.001 v1(-31.336,50.332)
NetR74_2: R74.2 VT44.3 | length 71.3
  Top Layer w0.254: v1(-93.058,51.748) -93.058,20.161 -90.746,17.85 R74.2@-90.727,17.85
  Bottom Layer w0.254: VT44.3@-125.1,59.1 -123.023,59.1 -120.402,56.479 -112.79,56.479 -111.687,55.376 -102.187,55.376 -100.616,56.947 -99.48,56.947 -94.281,51.748 v1(-93.058,51.748)
NetR75_2: R75.2 VT45.3 | length 48.8
  Top Layer w0.254: R75.2@-77.6,52.1 -77.6,52.872 -77.143,53.329 v1(-74.338,53.329)
  Bottom Layer w0.254: v1(-74.338,53.329) -50.471,53.329 -43.53,60.27 VT45.3@-32.6,60.27
NetR76_2: R76.2 VT46.3 | length 40.8
  Top Layer w0.254: VT46.3@-89.83,56.1 -89.83,21.937 -85.743,17.85 R76.2@-84.885,17.85
NetR77_2: R77.2 VT47.3 | length 63.2
  Top Layer w0.254: R77.2@-55.85,37.8 -55.85,37.254 -55.542,36.946 -53.891,36.946 -53.713,37.124 -53.713,40.756 -55.161,42.204 -55.161,54.32 v1(-53.764,55.717)
  Bottom Layer w0.254: v1(-53.764,55.717) -50.716,58.765 -50.716,66.309 -38.372,78.653 -30.017,78.653 VT47.3@-28,80.67
NetR78_2: R78.2 VT48.3 | length 36.5
  Top Layer w0.254: R78.2@-47.85,37.8 -47.85,37.124 -47.672,36.946 -45.89,36.946 -45.026,37.81 v1(-45.026,42.204)
  Bottom Layer w0.254: v1(-45.026,42.204) -34.436,42.204 -32.354,44.286 -32.354,50.84 -31.839,51.355 -25.915,51.355 VT48.3@-24.9,50.34
NetT1_1: T1.1 VT6.1 | length 42.1
  Top Layer w0.254: v1(-82.999,67.909) -82.714,67.909 -81.901,67.096 T1.1@-81.901,66.71
  Bottom Layer w0.254: v1(-82.999,67.909) -70.871,67.909 -66.34,72.44 -49.96,72.44 VT6.1@-46.2,76.2
NetT1_2: T1.2 VT7.3 | length 74
  Top Layer w0.254: VT7.3@-148.354,61.049 -147.72,61.049 -145.864,62.905 v1(-143.02,62.905) ; v1(-82.822,65.597) -82.466,65.953 -80.51,65.953 -79.926,66.537 T1.2@-79.926,66.71
  Bottom Layer w0.254: v1(-143.02,62.905) -113.886,62.905 -107.46,69.331 -88.308,69.331 -84.574,65.597 v1(-82.822,65.597)
NetVT1_3: VT1.3 VT2.1 | length 74
  Top Layer w0.254: VT1.3@-123.1,123.1 -120.617,125.583 v1(-120.617,139.308)
  Bottom Layer w0.254: v1(-120.617,139.308) -108.679,139.308 -107.256,140.731 -74.023,140.731 -73.214,139.922 -70.575,139.922 -69.741,140.756 -69.741,142.737 -70.2,143.197 VT2.1@-70.2,145.2
NetVT4_3: VT4.3 VT5.1 | length 128.6
  Top Layer w0.254: VT4.3@-41.36,101.1 -41.36,90.277 -30.015,78.932 v1(-30.015,72.811)
  Bottom Layer w0.254: VT5.1@-56.64,21.1 -56.64,19.344 -56.132,18.836 -23.182,18.836 -22.674,19.344 -22.674,70.5 -24.986,72.811 v1(-30.015,72.811)
NetVT8_3: VT8.3 VT9.1 | length 9
  Top Layer w0.254: VT9.1@-92.37,125.1 -92.37,117.53 VT8.3@-91.37,116.53
pads on no net: DD1.7 DD1.11 DD1.12 DD1.13 DD1.14 DD3.7 DD3.14 DD4.2 DD4.3 DD4.7 DD4.8 DD4.9 DD5.8 DD5.16 DD6.8 DD6.16 DD7.7 DD7.14 DD8.8 DD8.16 DD9.2 DD9.8 DD9.11 DD9.16 SA1.2 SB1.1

## Silkscreen, mask and mechanical layers (free items; w line width, h text height)
Mechanical 1:
  the board outline again, w0.05